# Altium PCB mainboard.PcbDoc
Units mil, origin at the board's own origin, x right, y up, seen from the top; angles counter-clockwise.
Board outline 6000 x 4000 mil, 2 copper layers (Top Layer, Bottom Layer); 74 components, 67 nets, 301 pads, 20 vias.
Unrouted connection lines stored in the file: 184.
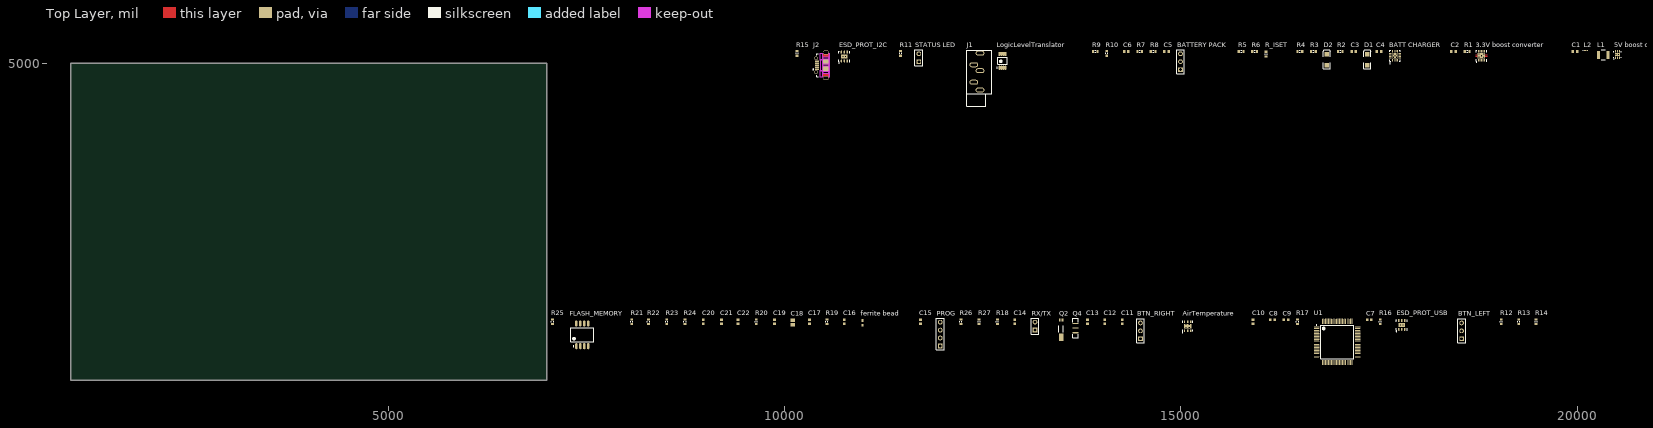
[diagram p0: Top Layer view]
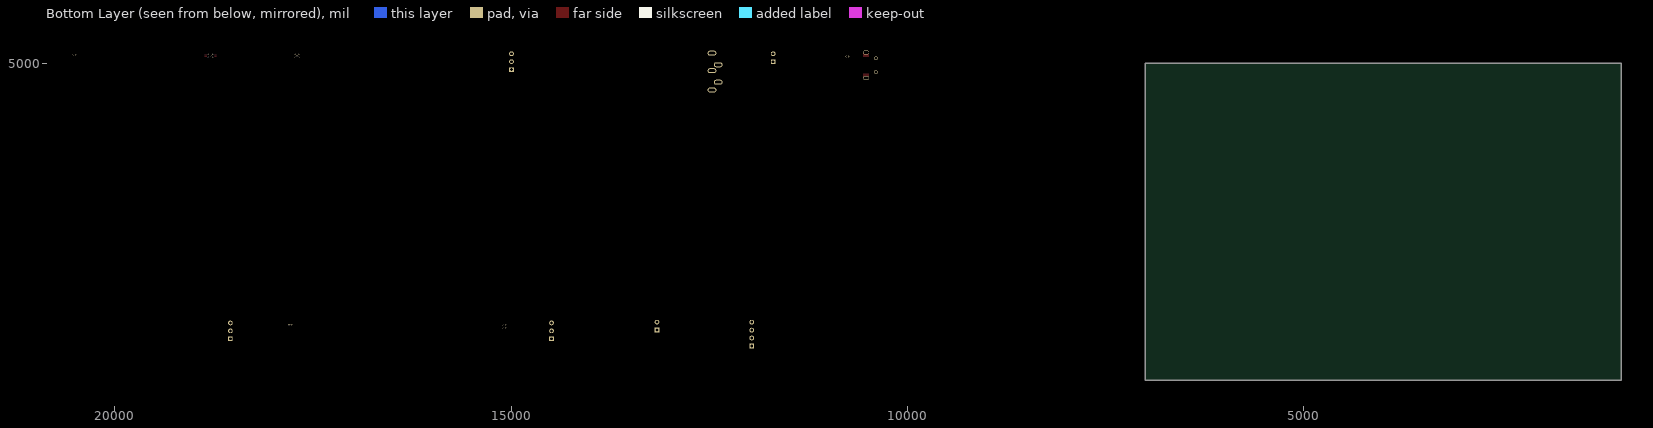
[diagram p1: Bottom Layer view, seen from below]

## Layer stack, top to bottom
Top Solder: solder mask 0.4, Solder Resist, Dk 3.5
Top Layer: signal copper 1.4
Dielectric 1: dielectric 12.6, FR-4, Dk 4.8
Bottom Layer: signal copper 1.4
Bottom Solder: solder mask 0.4, Solder Resist, Dk 3.5

## Board outline
1000,1000 7000,1000 7000,5000 1000,5000

## Design rules (kind name [scope] priority, off if disabled: settings)
Clearance [All] p1: gap=10
PolygonConnect [All] p1: connectstyle=Relief reliefconductorwidth=10 reliefentries=4 polygonreliefangle="90 Angle" airgapwidth=10
RoomDefinition mainboard [InComponentClass('mainboard')] p1: confinementstyle=ConfineIn formatcopy=TRUE lockcomponents=FALSE outline 7045,1060 21715,1060 21715,7115 7045,7115
RoutingVias [All] p1: holewidth=28 width=50 viastyle="Through Hole" minholewidth=28 minwidth=50 maxholewidth=28 maxwidth=50
SolderMaskExpansion [All] p1: expansion=4
Width [All] p1: maxlimit=10 minlimit=10 preferedwidth=10
29 further rules are at their usual default settings.

## Components (designator, comment, footprint, x,y, rotation, side; value= is the part's Value field where it differs from the comment)
"3.3V boost converter" "TPS63001DRCR" DRC10-2400X1650TP 18790,5095 r90 top
"5V boost converter" "TPS61240DRVT" DRV6-1600X1000TP 20505,5110 r90 top
AirTemperature "Si7055" Si7050/3/4/5 15085,1685 r90 top
"BATT CHARGER" "BQ24230RGTT" RGT16-1700X1700TP 17700,5095 r90 top
"BATTERY PACK" "Header 3" HDR1X3 14995,4920 r90 top
BTN_LEFT "Header 3" HDR1X3 18540,1525 r90 top
BTN_RIGHT "Header 3" HDR1X3 14490,1525 r90 top
C1 "Cap Semi" 1608[0603] 19970,5150 r0 top
C2 "Cap Semi" 1608[0603] 18440,5150 r0 top
C3 "Cap Semi" 1608[0603] 17180,5150 r0 top
C4 "Cap Semi" 1608[0603] 17500,5150 r0 top
C5 "Cap Semi" 1608[0603] 14820,5150 r0 top
C6 "Cap Semi" 1608[0603] 14310,5150 r0 top
C7 "Cap Semi" 1608[0603] 17375,1765 r0 top
C8 "Cap Semi" 1608[0603] 16155,1765 r0 top
C9 "Cap Semi" 1608[0603] 16325,1765 r0 top
C10 "Cap Semi" 1608[0603] 15910,1740 r90 top
C11 "Cap Semi" 1608[0603] 14260,1740 r90 top
C12 "Cap Semi" 1608[0603] 14040,1740 r90 top
C13 "Cap Semi" 1608[0603] 13820,1740 r90 top
C14 "Cap Semi" 1608[0603] 12905,1740 r90 top
C15 "Cap Semi" 1608[0603] 11715,1740 r90 top
C16 "Cap Semi" 1608[0603] 10755,1740 r90 top
C17 "Cap Semi" 1608[0603] 10315,1740 r90 top
C18 "Cap Pol3" C0805 10105,1730 r90 top
C19 "Cap Semi" 1608[0603] 9875,1740 r90 top
C20 "Cap Semi" 1608[0603] 8975,1740 r90 top
C21 "Cap Semi" 1608[0603] 9205,1740 r90 top
C22 "Cap Semi" 1608[0603] 9415,1740 r90 top
D1 "LED2" 3.2X1.6X1.1 17350,5045 r90 top
D2 "LED2" 3.2X1.6X1.1 16840,5045 r90 top
ESD_PROT_I2C "TPD2E001DRSR" DRS6-1900X1200TP 10755,5085 r90 top
ESD_PROT_USB "TPD2E001DRSR" DRS6-1900X1200TP 17785,1700 r90 top
"ferrite bead" "742861210" SMD-0603 10985,1725 r90 top
FLASH_MEMORY "SST25VF064C-80-4I-S3AE" MCHP-SOIC-S3A8_M 7450,1575 r90 top
J1 "Jack_5" Jack_5_socket 13045,4615 r90 top
J2 "micro USB" HIRO-ZX62D-AB-5P8_V 10460,4975 r90 top
L1 "LQH32CN220K21L" MURA-IND1210_V 20325,5105 r0 top
L2 "Inductor" 0603 20110,5160 r0 top
LogicLevelTranslator "PCA9515DP" TSOP65P490X110-8N 12750,5030 r90 top
PROG "Header 4" HDR1X4 11965,1435 r90 top
Q2 "32.768kHz" MS3V-T1R 13495,1640 r90 top
Q4 "CSTCR4M00G15L99" CSTCR_G15L 13670,1660 r90 top
R1 "Res3" J1-0603 18610,5150 r0 top
R2 "Res3" J1-0603 17010,5150 r0 top
R3 "Res3" J1-0603 16670,5150 r0 top
R4 "Res3" J1-0603 16500,5150 r0 top
R5 "Res3" J1-0603 15760,5150 r0 top
R6 "Res3" J1-0603 15930,5150 r0 top
R7 "Res3" J1-0603 14480,5150 r0 top
R8 "Res3" J1-0603 14650,5150 r0 top
R9 "Res3" J1-0603 13920,5150 r0 top
R10 "Res3" J1-0603 14065,5125 r90 top
R11 "Res3" J1-0603 11465,5125 r90 top
R12 "Res3" J1-0603 19040,1740 r90 top
R13 "Res3" J1-0603 19260,1740 r90 top
R14 "Res3" J1-0603 19480,1740 r90 top
R15 "Res3" J1-0603 10160,5125 r90 top
R16 "Res3" J1-0603 17515,1740 r90 top
R17 "Res3" J1-0603 16470,1740 r90 top
R18 "Res3" J1-0603 12685,1740 r90 top
R19 "Res3" J1-0603 10535,1740 r90 top
R20 "Res3" J1-0603 9645,1740 r90 top
R21 "Res3" J1-0603 8075,1740 r90 top
R22 "Res3" J1-0603 8285,1740 r90 top
R23 "Res3" J1-0603 8515,1740 r90 top
R24 "Res3" J1-0603 8745,1740 r90 top
R25 "Res3" J1-0603 7075,1740 r90 top
R26 "Res3" J1-0603 12225,1740 r90 top
R27 "Res3" J1-0603 12455,1740 r90 top
R_ISET "" J1-0603 16075,5115 r90 top
RX/TX "Header 2" HDR1X2 13160,1635 r90 top
"STATUS LED" "Header 2" HDR1X2 11695,5020 r90 top
U1 "MSP430F5529IPN" TI-PN80_N 16970,1485 r0 top

## Footprints (in the part's own frame and the unit in brackets; to place one, negate y for a bottom-side part, rotate by r counter-clockwise, add the part's x,y. Pads: shape width x height; smd on the part's side, far side on the other; paste and mask are expansions set on the pad)
3.2X1.6X1.1 [mm] "SMT LED; 2 Flat Leads"
  rect 1.5x1.5 smd: 1(-1.75,0) 2(1.75,0)
  silkscreen extent -2.9,-1.15 3.2,1.15
0603 [mm] "Chip Inductor, Body 0.6x0.3mm, IPC High Density"
  rect 0.5x0.3 smd: 1(-0.35,0) 2(0.35,0)
  silkscreen extent -0.9,-0.05 -0.9,0.05, body extent -0.33,-0.18 0.33,0.18, height 0.55
1608[0603] [mm] "Chip Capacitor, Body 1.6x0.8mm, IPC High Density"
  rect 0.8x0.9 smd: 1(-0.7,0) 2(0.7,0)
  body extent -0.87,-0.48 0.87,0.48, height 1.3
C0805 [mm] "Chip Capacitor, Body 2.0x1.3mm, IPC High Density"
  rect 1.1x1.4 smd: 1(-0.75,0) 2(0.75,0)
  body extent -1.1,-0.72 1.1,0.72, height 1.4
CSTCR_G15L [mm]
  rect 0.4x2 smd: 1(0,0) 2(-1.5,0) 6(1.5,0)
  silkscreen extent -3.15,-0.9 3.15,0.9
DRC10-2400X1650TP [mm] "SON, 10-Leads, Body 3x3mm, Pitch 0.5mm, Thermal Pad 2.4x1.65mm, TI Recommended"
  oval 0.85x0.28 smd paste-0.025 mask+0.07: 1(-1.475,1) 2(-1.475,0.5) 3(-1.475,0) 4(-1.475,-0.5) 5(-1.475,-1) 6(1.475,-1) 7(1.475,-0.5) 8(1.475,0) 9(1.475,0.5) 10(1.475,1)
  rect 1.65x2.4 smd paste-0.825 mask+0.07: 11(0,0)
  Top Layer region: -0.39,-1.9 -0.11,-1.9 -0.11,-1.2 -0.39,-1.2
  Top Layer region: 0.39,-1.2 0.11,-1.2 0.11,-1.9 0.39,-1.9
  Top Layer region: 0.39,1.9 0.11,1.9 0.11,1.2 0.39,1.2
  Top Layer region: -0.39,1.2 -0.11,1.2 -0.11,1.9 -0.39,1.9
  silkscreen extent -2.15,-1.7 1.7,1.7, body extent -1.55,-1.55 1.55,1.55, height 1
DRS6-1900X1200TP [mm] "SON, 6-Leads, Body 3x3mm, Pitch 0.95mm, Thermal Pad 2x1.3mm, TI Recommended"
  oval 0.95x0.4 smd paste-0.025 mask+0.07: 1(-1.425,0.95) 2(-1.425,0) 3(-1.425,-0.95) 4(1.425,-0.95) 5(1.425,0) 6(1.425,0.95)
  rect 1.3x2 smd paste-0.65 mask+0.07: 7(0,0)
  silkscreen extent -2.17,-1.73 1.73,1.77, body extent -1.57,-1.57 1.58,1.58, height 0.8
DRV6-1600X1000TP [mm] "SON, 6-Leads, Body 2x2mm, Pitch 0.65mm, Thermal Pad 1.6x1mm, TI Recommended"
  rect 0.7x0.3 smd paste-0.025 mask+0.07: 1(-1.05,0.65) 2(-1.05,0) 3(-1.05,-0.65) 4(1.05,-0.65) 5(1.05,0) 6(1.05,0.65)
  rect 1x1.6 smd paste-0.5 mask+0.07: 7(0,0)
  silkscreen extent -1.5,-1.2 1.05,1.25, body extent -1.05,-1.05 1.05,1.05, height 0.8
HDR1X2 [mm] "Connector; Header; 2 Position"
  rect 1.5x1.5 hole 0.9: 1(0,0)
  round 1.5 hole 0.9: 2(2.54,0)
  silkscreen extent -1.27,-1.27 3.81,1.27
HDR1X3 [mm] "Connector; Header; 3 Position"
  rect 1.5x1.5 hole 0.9: 1(0,0)
  round 1.5 hole 0.9: 2(2.54,0) 3(5.08,0)
  silkscreen extent -1.27,-1.27 6.35,1.27
HDR1X4 [mm] "Connector; Header; 4 Position"
  rect 1.5x1.5 hole 0.9: 1(0,0)
  round 1.5 hole 0.9: 2(2.54,0) 3(5.08,0) 4(7.62,0)
  silkscreen extent -1.27,-1.27 8.89,1.27
HIRO-ZX62D-AB-5P8_V [mm] "USB Micro-AB Connector, 5-Leads, Pitch 0.65mm"
  rect 0.4x1.35 smd: 1(-1.3,1.238) 2(-0.65,1.238) 3(0,1.238) 4(0.65,1.238) 5(1.3,1.238)
  oval 1.05x1.25 hole 0.65 slot 0.85 at 90 deg: 6(2.225,1.563) 11(-2.225,1.563)
  oval 1.225x1.9 hole 0.825 slot 1.5 at 90 deg: 7(4.088,-1.562) 10(-4.088,-1.562)
  rect 1.8x1.9 smd: 8(1.15,-1.562) 9(-1.15,-1.562)
  Top Layer region: -4.088,-2.513 -2.6,-2.513 -2.6,-0.613 -4.088,-0.613
  Top Layer region: 2.6,-2.513 4.088,-2.513 4.088,-0.613 2.6,-0.613
  Top Layer keep-out region: 2.59,-0.602 2.06,-0.602 2.06,-2.523 2.59,-2.523
  Top Layer keep-out region: -0.24,-2.522 0.24,-2.522 0.24,-0.602 -0.24,-0.602
  Top Layer keep-out region: -2.59,-2.523 -2.06,-2.523 -2.06,-0.602 -2.59,-0.602
  Top Layer keep-out region: -3.75,-2.887 3.75,-2.887 3.75,-2.522 -3.75,-2.522
  Top Layer keep-out region: 1.7,-0.602 3.75,-0.602 3.75,0.413 1.7,0.413
  Top Layer keep-out region: -1.7,-0.603 1.7,-0.603 1.7,0.213 -1.7,0.213
  Top Layer keep-out region: -3.75,-0.602 -1.7,-0.602 -1.7,0.413 -3.75,0.413
  silkscreen extent -3.75,0.91 3.75,2.59, body extent -4.37,-4.19 4.37,1.86, height 2.83
J1-0603 [mm] "Chip Resistor, Body 1.6x0.8mm, IPC High Density"
  rect 0.7x0.9 smd: 1(-0.75,0) 2(0.75,0)
  silkscreen extent -0.2,-0.35 0.2,0.35, body extent -0.85,-0.48 0.85,0.48, height 0.9
Jack_5_socket [mm] "jack with 5 connectors (model number PJ-325 on alibaba.com)"
  oval 1.6x2.8 hole 0.8 slot 2 at 90 deg: 1(1.2,14.7) 2(7.4,14.7) 3(9.3,16.7) 4(13,14.7) 5(3.7,16.7)
  silkscreen extent -4,10.9 14,19
MCHP-SOIC-S3A8_M [mm] "SOIC, 8-Leads, Body 7.21x5.28mm, Pitch 1.27mm, IPC Low Density"
  oval 2x0.7 smd: 1(-3.625,1.905) 2(-3.625,0.635) 3(-3.625,-0.635) 4(-3.625,-1.905) 5(3.625,-1.905) 6(3.625,-0.635) 7(3.625,0.635) 8(3.625,1.905)
  silkscreen extent -3.75,-3.65 2.23,3.65, body extent -2.7,-3.65 2.7,3.65, height 2.16
MS3V-T1R [mm]
  rect 2.4x1.5 smd: 1(-2.45,0.15)
  rect 1.1x0.6 smd: 2(3.1,-0.3) 3(3.1,0.6)
  silkscreen extent -0.89,-0.61 1.2,0.91
MURA-IND1210_V [mm] "SMT Inductor, 2 Leads, Body 3.2x2.5mm"
  rect 1x2.5 smd: 1(-1.5,0) 2(1.5,0)
  silkscreen extent -0.6,-1.6 0.6,1.6, body extent -1.38,-1.14 1.41,1.15, height 1.78
RGT16-1700X1700TP [mm] "QFN, 16-Leads, Body 3x3mm, Pitch 0.5mm, Thermal Pad 1.7x1.7mm, TI Recommended"
  oval 0.85x0.28 smd paste-0.025 mask+0.07: 1(-1.475,0.75) 2(-1.475,0.25) 3(-1.475,-0.25) 4(-1.475,-0.75) 9(1.475,-0.75) 10(1.475,-0.25) 11(1.475,0.25) 12(1.475,0.75)
  oval 0.28x0.85 smd paste-0.025 mask+0.07: 5(-0.75,-1.475) 6(-0.25,-1.475) 7(0.25,-1.475) 8(0.75,-1.475) 13(0.75,1.475) 14(0.25,1.475) 15(-0.25,1.475) 16(-0.75,1.475)
  rect 1.7x1.7 smd paste-0.85 mask+0.07: 17(0,0)
  silkscreen extent -2.5,-1.73 1.73,1.73, body extent -1.57,-1.57 1.58,1.58, height 1
Si7050/3/4/5 [mm] "I2C Temperature sensor SON, 6-Leads, Body 3.00x3.00mm, Pitch 1.00mm, Thermal Pad 2.40x1.50mm, IPC Medium Density"
  rect 0.85x0.45 smd: 1(-1.45,1) 2(-1.45,0) 3(-1.45,-1) 4(1.45,-1) 5(1.45,0) 6(1.45,1)
  rect 1.5x2.4 smd: 7(0,0)
  silkscreen extent -2.1,-1.65 1.65,1.7, body extent -1.5,-1.5 1.5,1.5, height 0.85
SMD-0603 [mm] "Chip Inductor, 2-Leads, Body 1.6x0.8mm"
  rect 0.85x0.7 smd: 1(-0.775,0) 2(0.775,0)
  body extent -0.8,-0.4 0.8,0.4, height 0.79
TI-PN80_N [mm] "QFP, 80-Leads, Body 12x12mm, Pitch 0.5mm, IPC Medium Density"
  oval 1.75x0.3 smd: 1(-6.575,4.75) 2(-6.575,4.25) 3(-6.575,3.75) 4(-6.575,3.25) 5(-6.575,2.75) 6(-6.575,2.25) 7(-6.575,1.75) 8(-6.575,1.25) 9(-6.575,0.75) 10(-6.575,0.25) 11(-6.575,-0.25) 12(-6.575,-0.75) 13(-6.575,-1.25) 14(-6.575,-1.75) 15(-6.575,-2.25) 16(-6.575,-2.75) 17(-6.575,-3.25) 18(-6.575,-3.75) 19(-6.575,-4.25) 20(-6.575,-4.75) 41(6.575,-4.75) 42(6.575,-4.25) 43(6.575,-3.75) 44(6.575,-3.25) 45(6.575,-2.75) 46(6.575,-2.25) 47(6.575,-1.75) 48(6.575,-1.25) 49(6.575,-0.75) 50(6.575,-0.25) 51(6.575,0.25) 52(6.575,0.75) 53(6.575,1.25) 54(6.575,1.75) 55(6.575,2.25) 56(6.575,2.75) 57(6.575,3.25) 58(6.575,3.75) 59(6.575,4.25) 60(6.575,4.75)
  oval 0.3x1.75 smd: 21(-4.75,-6.575) 22(-4.25,-6.575) 23(-3.75,-6.575) 24(-3.25,-6.575) 25(-2.75,-6.575) 26(-2.25,-6.575) 27(-1.75,-6.575) 28(-1.25,-6.575) 29(-0.75,-6.575) 30(-0.25,-6.575) 31(0.25,-6.575) 32(0.75,-6.575) 33(1.25,-6.575) 34(1.75,-6.575) 35(2.25,-6.575) 36(2.75,-6.575) 37(3.25,-6.575) 38(3.75,-6.575) 39(4.25,-6.575) 40(4.75,-6.575) 61(4.75,6.575) 62(4.25,6.575) 63(3.75,6.575) 64(3.25,6.575) 65(2.75,6.575) 66(2.25,6.575) 67(1.75,6.575) 68(1.25,6.575) 69(0.75,6.575) 70(0.25,6.575) 71(-0.25,6.575) 72(-0.75,6.575) 73(-1.25,6.575) 74(-1.75,6.575) 75(-2.25,6.575) 76(-2.75,6.575) 77(-3.25,6.575) 78(-3.75,6.575) 79(-4.25,6.575) 80(-4.75,6.575)
  silkscreen extent -6.7,-5.3 5.3,5.57, body extent -6,-6 6,6, height 1.6
TSOP65P490X110-8N [mm] "TSOP, 8-Leads, Body 3.00x3.00mm, Pitch 0.65mm, IPC Medium Density"
  oval 1.35x0.55 smd: 1(-2.225,0.975) 2(-2.225,0.325) 3(-2.225,-0.325) 4(-2.225,-0.975) 5(2.225,-0.975) 6(2.225,-0.325) 7(2.225,0.325) 8(2.225,0.975)
  silkscreen extent -2.35,-1.55 1.15,1.92, body extent -1.55,-1.55 1.55,1.55, height 1.1

## Part data
"3.3V boost converter": library part CMP-0345-00006-1, "Buck-Boost Voltage Converter with 1.8 to 5.5 V Input and 3.3 V Output, -40 to 85 degC, 10-Pin SON (DRC), Green (RoHS & no Sb/Br)"
"5V boost converter": library part CMP-0343-00063-1, "Boost Voltage Converter with 2.3 to 5.5 V Input and 5 V Output, 6-Pin SON (DRV), Green (RoHS & no Sb/Br)"
"BATT CHARGER": library part CMP-0321-00264-1, "USB Friendly 0.5 A Li+ Charger with Dynamic Power Management, 6.6 V OVP, 4.3 V, -40 to 85 degC, 16-pin QFN (RGT), Green (RoHS & no Sb/Br)"
"BATTERY PACK" BTN_LEFT BTN_RIGHT: "Header, 3-Pin"
C1 C2 C3 C4 C5 C6 C7 C8 C9 C10 C11 C12 C13 C14 C15 C16 C17 C19 C20 C21 C22: "Capacitor (Semiconductor SIM Model)"
C18: "Polarized Capacitor (Surface Mount)"
D1 D2: "Typical RED, GREEN, YELLOW, AMBER GaAs LED"
ESD_PROT_I2C ESD_PROT_USB: library part CMP-0326-00040-1, "Low-Capacitance + / - 15 kV ESD-Protection Array for High-Speed Data Interfaces, 2 Channels, -40 to +85 degC, 6-pin SON (DRS), Green (RoHS & no Sb/Br)"
"ferrite bead": library part CMP-0220-00121-1, "SMD EMI Suppression Ferrite Bead WE-CBF HF, Z = 1000 Ohm"
FLASH_MEMORY: library part CMP-0378-00064-1, "64 Mbit SPI Serial Flash, 2.7 to 3.6 V, 80 MHz, -40 to 85 degC, 8-pin SOIC (S3A8), Tube"
J1: "4 pin 5 contact headphone jack 3.5mm"
J2: library part CMP-1349-00001-1, "USB 2.0 Standard Micro-USB Connector, Micro AB-Standard (Bottom Mount), 30 V AC, -30 to 85 degC, Right Angle, 5-Pin 7.5 x 5.6 x 2.8 mm SMD, RoHS, Reel"
L1: library part CMP-0414-00001-2, "Inductor, Coil 22 uH 1210 (3225) LQH32CN220K21L"
LogicLevelTranslator: "PCA9515 I2C logic level converter"
PROG: "Header, 4-Pin"
Q2: library part MS3V-T1R
Q4: library part MURATA-FILTER_CSTCR, "<b>Resonator</b><p> / Source: murata.co.jp"
R1 R2 R3 R4 R5 R6 R7 R8 R9 R10 R11 R12 R13 R14 R15 R16 R17 R18 R19 R20 R21 R22 R23 R24 R25 R26 R27: "Resistor"
R_ISET: library part Res3, "Resistor"
RX/TX "STATUS LED": "Header, 2-Pin"
U1: library part CMP-0365-00412-1, "25 MHz Mixed Signal Microcontroller with 128 KB Flash, 8192 B SRAM and 63 GPIOs, -40 to 85 degC, 80-pin QFP (PN), Green (RoHS & no Sb/Br)"

## Via types
v1: diameter 19.68, hole 7.87, Top Layer to Bottom Layer, 15 vias
v2: diameter 19.68, hole 7.87, Top Layer to Bottom Layer, tented top, 5 vias

## Nets (pads, with @x,y where several pads share a name; then routed paths per layer and width w, separated by ;. In a path a pad name is that pad's centre, name@x,y a point inside that pad or via, vN(x,y) a via of type N, cw(c..) or ccw(c..) an arc to the next point about the centre after c; other vN are vias at no path point)
5VENABLE: "5V boost converter.4" J1.5 LogicLevelTranslator.5 R1.2 U1.39
5VOUT: "5V boost converter.2" "5V boost converter.3" C1.2 C6.2 C7.2 ESD_PROT_I2C.1 J1.1 R8.2 R10.2
+5: "BATT CHARGER.13" C3.2 C10.2 C18.1 ESD_PROT_USB.1 J2.1 U1.65
BAT+: "BATT CHARGER.2" "BATT CHARGER.3" "BATTERY PACK.2" C5.2
CHARGE_EN: "BATT CHARGER.4" R6.1 U1.73
GND: "3.3V boost converter.3" "3.3V boost converter.9" "3.3V boost converter.11" "5V boost converter.1" "5V boost converter.7" "BATT CHARGER.5" "BATT CHARGER.8" "BATT CHARGER.15" "BATT CHARGER.17" "BATTERY PACK.1" "STATUS LED.2" AirTemperature.2 BTN_LEFT.1 BTN_RIGHT.3 C1.1 C2.1 C3.1 C4.1 C5.1 C6.1 C7.1 C8.1 C9.1 C10.1 C11.1 C12.1 C13.1 C14.1 C15.2 C16.2 C17.1 C18.2 C19.2 C20.1 C21.1 C22.1 ESD_PROT_I2C.4 ESD_PROT_USB.4 FLASH_MEMORY.4 J1.2 J2.5 J2.6 J2.11 LogicLevelTranslator.4 PROG.4 Q4.2 R4.2 R5.1 R6.2 R18.1 R20.2 R26.1 R27.1 R_ISET.1 U1.14 U1.19 U1.49 U1.61 U1.68
  other v1: 18760.47,5075.31 18819.53,5075.31 18790,5095 20489.25,5110 20520.75,5110 18760.47,5114.69 18819.53,5114.69
  other v2: 17680.31,5075.31 17719.69,5075.32 17700,5095 17680.31,5114.69 17719.69,5114.69
"Net3.3V boost converter_2": "3.3V boost converter.2" L1.2
"Net3.3V boost converter_4": "3.3V boost converter.4" L1.1
"Net5V boost converter_5": "5V boost converter.5" L2.2
"NetBATT CHARGER_7": "BATT CHARGER.7" D2.2
"NetBATT CHARGER_9": "BATT CHARGER.9" D1.2
"NetBATT CHARGER_14": "BATT CHARGER.14" R5.2
"NetBATT CHARGER_16": "BATT CHARGER.16" R_ISET.2
NetBTN_LEFT_2: BTN_LEFT.2 R13.1 U1.23
NetBTN_LEFT_3: BTN_LEFT.3 R12.1 U1.22
NetBTN_RIGHT_1: BTN_RIGHT.1 R15.1 U1.25
NetBTN_RIGHT_2: BTN_RIGHT.2 R14.1 U1.24
NetC12_2: C12.2 U1.12
NetC14_2: C14.2 U1.13
NetC15_1: C15.1 U1.67
NetC16_1: C16.1 U1.20
NetD1_1: D1.1 R2.1
NetD2_1: D2.1 R3.1
"Netferrite bead_2": "ferrite bead.2"
NetJ2_2: J2.2 R16.1
NetJ2_3: J2.3 R17.1
NetPROG_2: PROG.2 U1.76
NetPROG_3: PROG.3 U1.71
NetR11_2: R11.2 U1.21
NetR19_1: R19.1 U1.63
NetR21_2: R21.2
NetR22_2: R22.2
NetR23_2: R23.2
NetR24_2: R24.2
RX_FROM_GPS: U1.52
RX_FROM_ZIGBEE: RX/TX.2 U1.41
SCL: AirTemperature.6 LogicLevelTranslator.2 R7.1 U1.38
SCL5V: ESD_PROT_I2C.3 J1.3 LogicLevelTranslator.7 R8.1
SCREEN_BORDER: U1.35
SCREEN_BUSY: U1.36
SCREEN_DISCHARGE: U1.32
SCREEN_PANEL_ON: U1.16
SCREEN_PWM: U1.7
SCREEN_RST_LOW: U1.6
SCREEN_TEMP: U1.3
SDA: AirTemperature.1 LogicLevelTranslator.3 R9.1 U1.37
SDA5V: ESD_PROT_I2C.6 J1.4 LogicLevelTranslator.6 R10.1
SPI_EPD_CS: U1.2
SPI_FLASH_CS: FLASH_MEMORY.1 R25.1 U1.79
SPI_MISO: FLASH_MEMORY.2 R24.1 U1.47
SPI_MOSI: FLASH_MEMORY.5 R23.1 U1.46
SPI_SCK: FLASH_MEMORY.6 R21.1 U1.45
SPI_SD_CS: U1.77
SPI_XBEE_CS: R22.1 U1.78
TEMP: "BATT CHARGER.1" "BATTERY PACK.3"
TX_TO_GPS: U1.51
TX_TO_ZIGBEE: RX/TX.1 U1.40
USB500: "BATT CHARGER.6" R4.1 U1.72
USBDM: C9.2 ESD_PROT_USB.6 R16.2 U1.64
USBDP: C8.2 ESD_PROT_USB.3 R17.2 R19.2 R20.1 U1.62
V_SYS: "3.3V boost converter.5" "3.3V boost converter.6" "3.3V boost converter.7" "3.3V boost converter.8" "5V boost converter.6" "BATT CHARGER.10" "BATT CHARGER.11" C2.2 C4.2 L2.1 R2.2 R3.2
VCC: "3.3V boost converter.1" "3.3V boost converter.10" "ferrite bead.1" AirTemperature.5 C11.2 C13.2 C17.2 C19.1 C20.2 C21.2 C22.2 FLASH_MEMORY.3 FLASH_MEMORY.7 FLASH_MEMORY.8 LogicLevelTranslator.8 PROG.1 R1.1 R7.2 R9.2 R12.2 R13.2 R14.2 R15.2 R25.2 U1.11 U1.18 U1.50 U1.66
XT2IN: Q4.1 U1.69
XT2OUT: U1.70
ZIGBEE_RST: R18.2 U1.43
ZIGBEE_RTS: R27.2 U1.44
ZIGBEE_SLEEP: R26.2 U1.42
pads on no net: "BATT CHARGER.12" "STATUS LED.1" AirTemperature.3 AirTemperature.4 AirTemperature.7 ESD_PROT_I2C.2 ESD_PROT_I2C.5 ESD_PROT_I2C.7 ESD_PROT_USB.2 ESD_PROT_USB.5 ESD_PROT_USB.7 J2.4 J2.7 J2.8 J2.9 J2.10 LogicLevelTranslator.1 Q2.1 Q2.2 Q2.3 Q4.6 R11.1 U1.1 U1.4 U1.5 U1.8 U1.9 U1.10 U1.15 U1.17 U1.26 U1.27 U1.28 U1.29 U1.30 U1.31 U1.33 U1.34 U1.48 U1.53 U1.54 U1.55 U1.56 U1.57 U1.58 U1.59 U1.60 U1.74 U1.75 U1.80
copper on no net:
  other v1: 15065.31,1665.32 15104.68,1665.32 17769.25,1700 17800.75,1700 15065.31,1704.69 15104.68,1704.69 10739.25,5085 10770.75,5085

## Text inside footprints (layer, text, board x,y; h text height)
J2: Mechanical 3 "board edge" at 10575,4695 h7.87 r90